# Altium PCB PCB2.PcbDoc
Units mm, origin at the board's own origin, x right, y up, seen from the top; angles counter-clockwise.
Board outline 91.65 x 61.98 mm, 2 copper layers (Top Layer, Bottom Layer); 22 components, 20 nets, 77 pads, 0 vias.
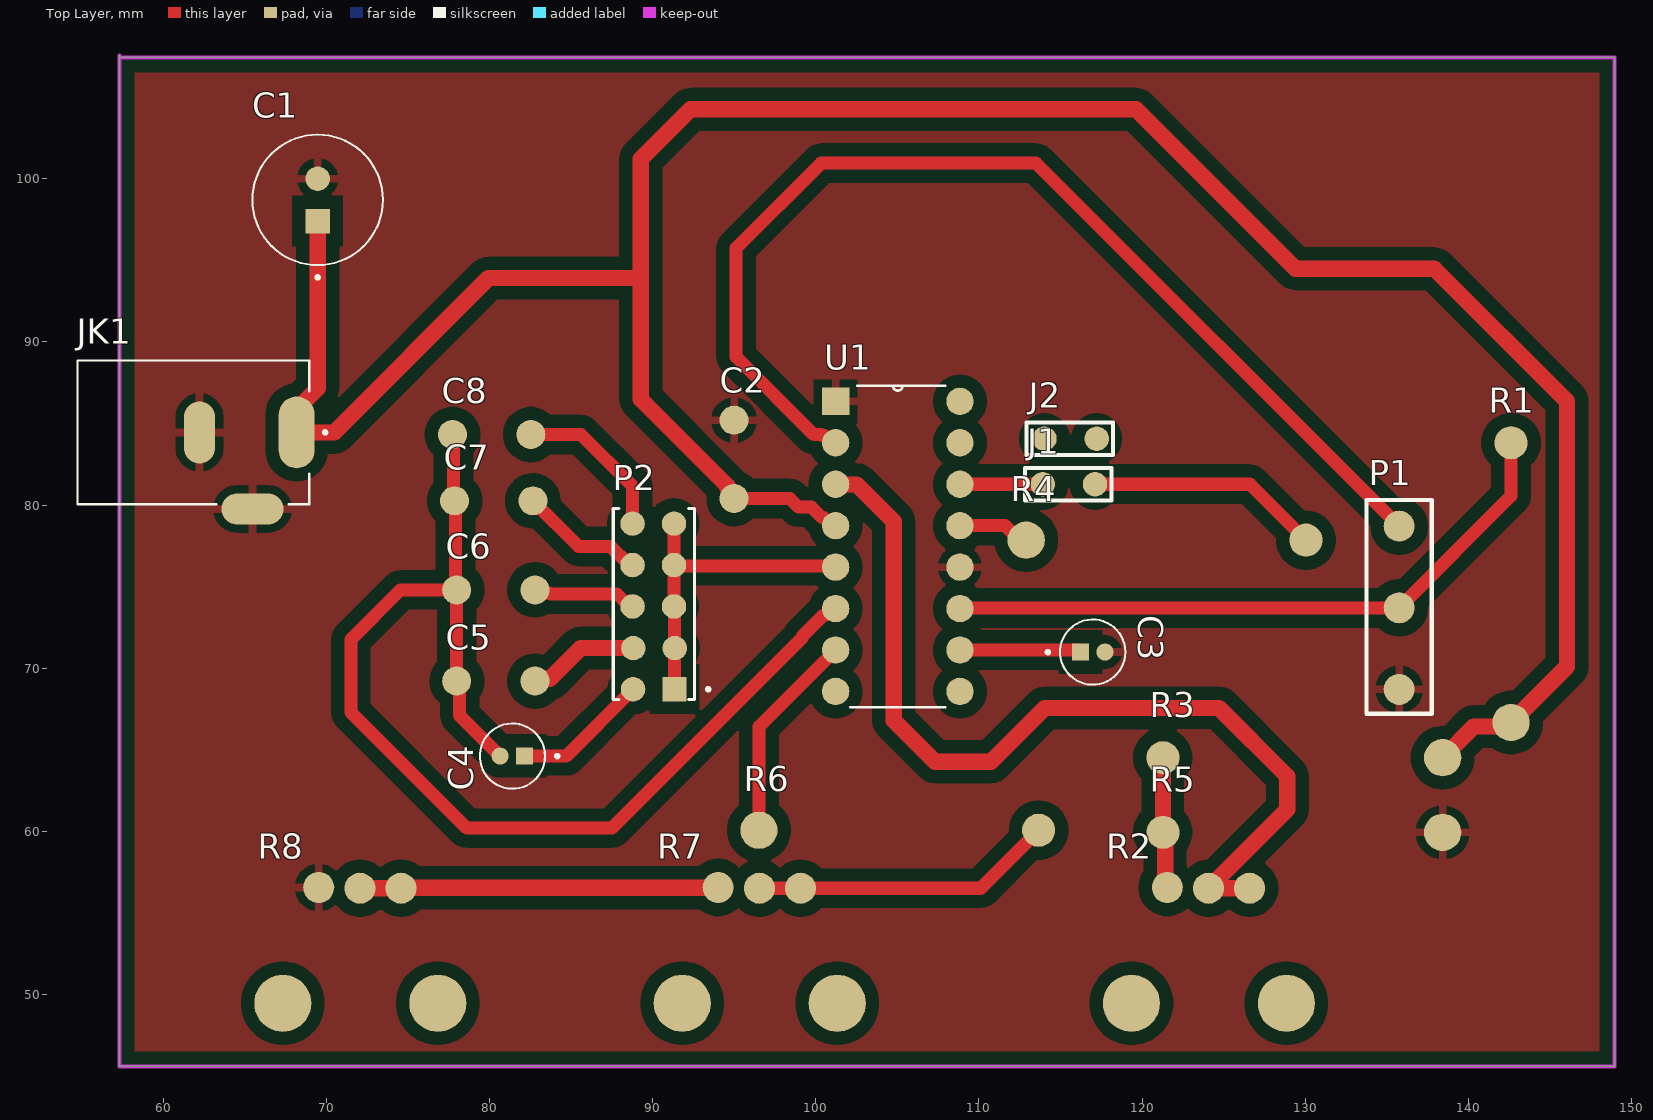
[diagram p0: Top Layer view]
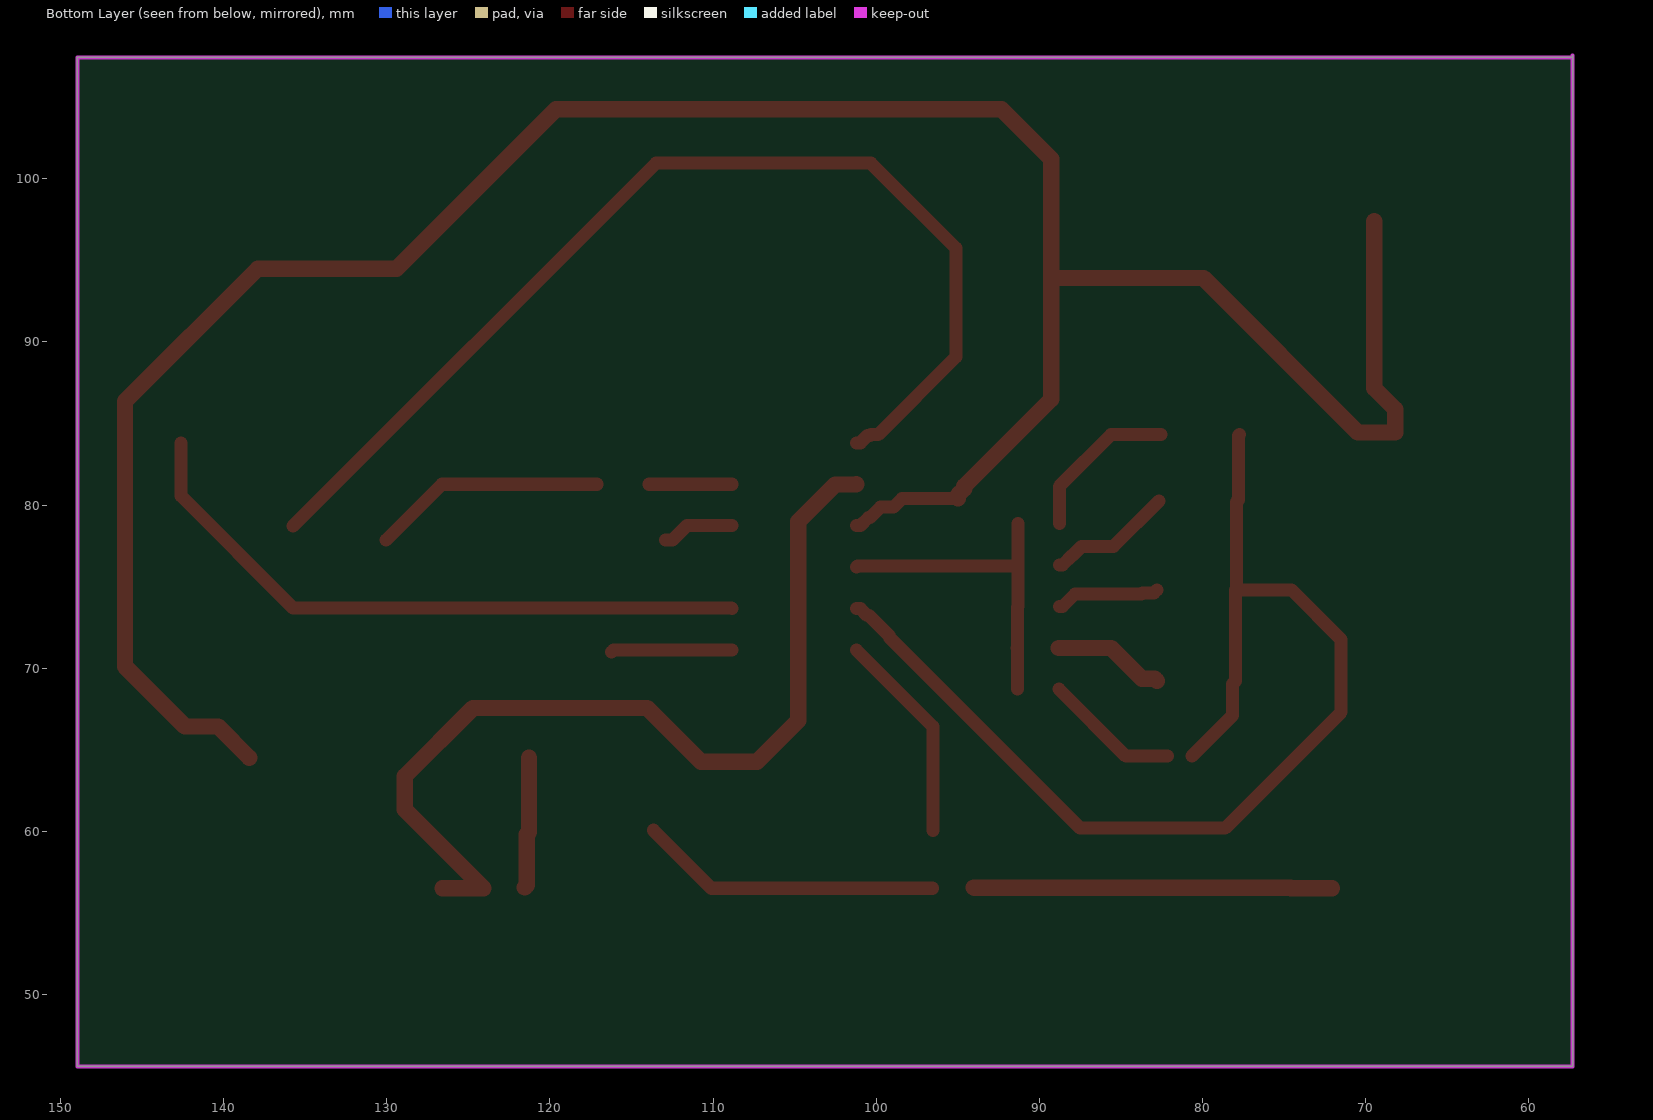
[diagram p1: Bottom Layer view, seen from below]

## Layer stack, top to bottom
Top Solder: solder mask 0.0102, Solder Resist, Dk 3.5
Top Layer: signal copper 0.0356
Dielectric 1: dielectric 0.32, FR-4, Dk 4.8
Bottom Layer: signal copper 0.0356
Bottom Solder: solder mask 0.0102, Solder Resist, Dk 3.5

## Board outline
57.319,45.593 57.319,107.569 57.319,107.442 148.971,107.442 148.971,45.593

## Design rules (kind name [scope] priority, off if disabled: settings)
Clearance [All] p1: gap=0.8 ignorepadtopadclearanceinfootprint=FALSE except(0: Arc-Hole Track-Hole SMDPad-Hole THPad-Hole Via-Hole Fill-Hole Poly-Hole Region-Hole Text-Hole)
DiffPairsRouting [All] p1: maxlimit=1 minlimit=0.254 mostfreqgap=0.254 toplayer_minwidth=0.381 toplayer_maxwidth=1 toplayer_prefwidth=0.381 bottomlayer_minwidth=0.381 bottomlayer_maxwidth=1 bottomlayer_prefwidth=0.381 maxuncoupledlength=12.7
PolygonConnect [All] p1: connectstyle=Relief reliefconductorwidth=0.5 reliefentries=4 polygonreliefangle="90 Angle" airgapwidth=0.5
RoutingVias [All] p1: holewidth=0.711 width=1.27 viastyle="Through Hole" minholewidth=0.711 minwidth=1.27 maxholewidth=0.711 maxwidth=1.27
SolderMaskExpansion [All] p1: expansion=0.8 istentingtop=FALSE
Width [All] p1: maxlimit=1 minlimit=0.254 preferedwidth=0.254 minimp=50.000000 maximp=50.000000 favimp=50.000000
29 further rules are at their usual default settings.

## Components (designator, comment, footprint, x,y, rotation, side; value= is the part's Value field where it differs from the comment)
C1 "100uF CAPATICANCE" EEUFR1V101B 69.469,98.709 r90 top
C2 "0.1uF capaticance" "TH CAPACITOR" 94.996,82.804 r180 top
C3 "10uF TH CAPACITANCE" "10uf capacitance" 116.979,71.093 r0 top
C4 "10uF TH CAPACITANCE" "10uf capacitance" 81.407,64.516 r180 top
C5 "105 capaticance" "TH CAPACITOR" 80.391,69.215 r90 top
C6 "473 capaticance" "TH CAPACITOR" 80.391,74.803 r90 top
C7 "222 capaticance" "TH CAPACITOR" 80.264,80.264 r90 top
C8 "101 capacitance" "TH CAPACITOR" 80.137,84.328 r90 top
J1 "JUMPER" JUMPER 117.119,81.28 r180 top
J2 "JUMPER" JUMPER 117.221,84.074 r180 top
JK1 "DC Barrek Jack_-" "DC BARREL JACK" 62.23,84.455 r270 top
P1 "1x3 header" "1x3 header - duplicate" 135.763,78.707 r180 top
P2 "2.54mm 2x5 TH Header" "2x5 HEADER" 90.073,69.987 r270 top
R1 "1K TH RESISTOR" "TH RESISTOR" 142.494,74.422 r0 top
R2 "50K POTANTIOMETER" POTANTIOMETER 122.25,40.462 r90 top
R3 "5.1K TH RESISTOR" "TH RESISTOR" 130.683,64.389 r90 top
R4 "330 OHM TH RESISTOR" "TH RESISTOR" 120.65,77.978 r270 top
R5 "5.1K TH RESISTOR" "TH RESISTOR" 130.683,59.817 r90 top
R6 "5.1K TH RESISTOR" "TH RESISTOR" 104.267,60.198 r270 top
R7 "50K POTANTIOMETER" POTANTIOMETER 94.721,40.462 r90 top
R8 "100K POTANTIOMETER" POTANTIOMETER 70.235,40.462 r90 top
U1 "XR2206" XR2206 104.902,77.47 r0 top

## Footprints (in the part's own frame and the unit in brackets; to place one, negate y for a bottom-side part, rotate by r counter-clockwise, add the part's x,y. Pads: shape width x height; smd on the part's side, far side on the other; paste and mask are expansions set on the pad)
"1x3 header - duplicate" [mm]
  round 1.905 smd mask+0.05: 1(0,0) 2(0,5) 3(0,10)
  silkscreen extent -2,-1.6 2,11.5
"2x5 HEADER" [mm]
  rect 1.5x1.5 smd: 1(1.27,1.27)
  round 1.5 smd: 2(-1.25,1.29) 3(-3.8,1.24) 4(-6.34,1.24) 5(1.27,-1.27) 6(-1.25,-1.25) 7(-3.8,-1.3) 8(-6.34,-1.3) 9(-8.88,1.24) 10(-8.88,-1.3)
  silkscreen extent -9.8,-2.49 1.91,3.44, body extent -10.15,-2.5 2.55,2.58, height 9.5
"10uf capacitance" [mm]
  rect 1.05x1.05 smd: 1(-0.75,-0.1)
  round 1.05 smd: 2(0.75,-0.1)
  silkscreen extent -2.85,-2.1 2,1.9, body extent -2,-2.1 2,1.9, height 7
"DC BARREL JACK" [mm]
  oval 4.4x2.2 smd: 1(0,5.955)
  oval 3.8x1.9 smd: 2(0,0)
  oval 1.9x3.8 smd: 3(4.69,3.25)
  silkscreen extent -4.4,-7.49 4.4,7.8, body extent -4.4,-7.77 5.15,6.65, height 11.34
EEUFR1V101B [mm] "100uF CAPATAICANCE"
  rect 1.5x1.5 smd: 1(-1.3,0)
  round 1.5 smd paste+0: 2(1.3,0)
  silkscreen extent -4.85,-4 4,4, body extent -4,-4 4,4, height 11.5
JUMPER [mm]
  round 1.5 smd mask+0.05: 1(0,0) 2(3.2,0)
  silkscreen extent -1,-1 4.3,1
POTANTIOMETER [mm]
  round 1.905 smd mask+0.05: 1(16.1,0.7) 2(16.053,-1.829) 3(16.053,-4.343)
  round 3.5 smd mask+0.05: ""(9,-6.6) ""(9,2.9)
  body extent 3.65,-6.68 16.2,3.07, height 19.78
"TH CAPACITOR" [mil]
  round 70 smd mask+1.97: 1(0,94.49) 2(0,-94.49)
  body extent -45,-110 45,110, height 250
"TH RESISTOR" [mil]
  round 90 smd mask+1.97: 1(5,-305)
  round 80 smd mask+1.97: 2(5,370)
  body extent -59,-311 73,390, height 142
XR2206 [mil]
  rect 66x66 smd: 1(-145,350)
  round 66 smd: 2(-145,250) 3(-145,150) 4(-145,50) 5(-145,-50) 6(-145,-150) 7(-145,-250) 8(-145,-350) 9(155,-350) 10(155,-250) 11(155,-150) 12(155,-50) 13(155,50) 14(155,150) 15(155,250) 16(155,350)
  silkscreen extent -110,-388 120,388, body extent -150,-396 160,396, height 210

## Part data
JK1: "Power Barrel Connector Jack 2.10mm ID _0.083_, 5.50mm OD _0.217_ Through Hole, Right Angle", Package="Non-Standard MPD", Availability=Unavailable, MF=MPD, MP=EJ508A, Price=None, SnapEDA_Link=https://www.snapeda.com/parts/EJ508A/MPD%20%28Memory%20Protection%20Devices%29/view-part/474399/?ref=snap
P2: "2.54mm 2X3 TH Header"
R8: library part "100K POTANTIMETER"

## Nets (pads, with @x,y where several pads share a name; then routed paths per layer and width w, separated by ;. In a path a pad name is that pad's centre, name@x,y a point inside that pad or via, vN(x,y) a via of type N, cw(c..) or ccw(c..) an arc to the next point about the centre after c; other vN are vias at no path point)
GND: C1.2 C2.2 C3.2 JK1.2 JK1.3 P1.3 R5.1 R8.1 U1.1 U1.12
NetC3_1: C3.1 U1.10 | length 7.4
  Top Layer w0.8: U1.10 116.102,71.12 C3.1
NetC4_1: C4.1 P2.5 | length 8.3
  Top Layer w0.8: C4.1 84.702,64.616 P2.5
NetC4_2: C4.2 C5.1 C6.1 C7.1 C8.1 U1.6 | length 71.4
  Top Layer w0.8: C8.1 77.8,84.264 77.8,80.328 C7.1 77.927,80.2 77.927,74.867 C6.1 ; C4.2 78.178,67.095 78.178,69.028 C5.1 C6.1 ; U1.6 100.982,73.66 100.544,73.222 100.438,73.222 99.181,71.964 99.181,71.876 87.503,60.198 78.613,60.198 71.501,67.31 71.501,71.755 74.549,74.803 C6.1
NetC5_2: C5.2 P2.6 | length 6.9
  Top Layer w1: C5.2 82.94,69.364 83.715,69.364 85.588,71.237 P2.6
NetC6_2: C6.2 P2.7 | length 6.4
  Top Layer w0.8: C6.2 82.978,74.616 83.67,74.616 83.737,74.549 87.822,74.549 88.584,73.787 P2.7
NetC7_2: C7.2 P2.8 | length 7.7
  Top Layer w0.8: C7.2 85.458,77.47 87.412,77.47 87.965,76.917 87.994,76.917 88.584,76.327 P2.8
NetC8_2: C8.2 P2.10 | length 9.8
  Top Layer w0.8: C8.2 85.598,84.328 88.773,81.153 P2.10
NetJ1_1: J1.1 R4.2 | length 14.3
  Top Layer w0.8: J1.1 126.619,81.28 R4.2
NetJ1_2: J1.2 U1.14 | length 5.1
  Top Layer w0.8: U1.14 J1.2
NetP1_1: P1.1 U1.2 | length 67
  Top Layer w0.8: U1.2 100.982,83.82 100.544,84.258 100.376,84.258 100.312,84.322 99.884,84.322 95.123,89.083 95.123,95.758 100.33,100.965 113.505,100.965 P1.1
NetP1_2: P1.2 R1.2 U1.11 | length 39.9
  Top Layer w0.8: U1.11 108.863,73.684 135.739,73.684 P1.2 142.621,80.565 R1.2
NetP2_1: P2.1 P2.2 P2.3 P2.4 P2.9 U1.5 | length 20.1
  Top Layer w0.8: P2.9 P2.4 ; P2.1 91.353,68.727 91.353,71.227 P2.2 91.338,71.262 91.338,73.762 P2.3 P2.4 ; U1.5 101.155,76.263 91.376,76.263 P2.4
NetR2_1: R2.1 R3.2 R5.2 | length 8.1
  Top Layer w1: R3.2 R5.2 121.418,59.811 121.418,56.695 R2.1
NetR2_2: R2.2 R2.3 U1.3 | length 56.4
  Top Layer w1: U1.3 101.237,81.262 102.507,81.262 104.775,78.994 104.775,66.802 107.315,64.262 110.744,64.262 114.046,67.564 124.714,67.564 128.905,63.373 128.905,61.341 R2.2 R2.3
NetR4_1: R4.1 U1.13 | length 4.4
  Top Layer w0.8: U1.13 111.612,78.74 112.501,77.851 R4.1
NetR6_1: R6.1 U1.7 | length 13
  Top Layer w0.8: R6.1 96.52,66.421 U1.7
NetR6_2: R6.2 R7.2 R7.3 | length 18.6
  Top Layer w0.8: R7.2 R7.3 110.109,56.515 R6.2
NetR7_1: R7.1 R8.2 R8.3 | length 22
  Top Layer w1: R8.2 R8.3 74.602,56.539 93.997,56.539 R7.1
VCC: C1.1 C2.1 JK1.1 R1.1 R3.1 U1.4 | length 160
  Top Layer w0.8: C2.1 98.412,80.404 98.933,79.883 99.734,79.883 100.375,79.242 100.48,79.242 100.982,78.74 U1.4
  Top Layer w1: C1.1 69.469,87.164 68.185,85.88 JK1.1 70.485,84.455 79.947,93.916 89.181,93.916 ; 89.281,101.219 89.281,93.916 89.281,86.487 94.607,81.161 94.607,81.004 94.996,80.615 C2.1 ; 89.352,101.29 92.329,104.267 119.634,104.267 129.413,94.488 137.922,94.488 146.05,86.36 146.05,70.104 R1.1 142.375,66.429 140.343,66.429 R3.1
pads on no net: J2.1 J2.2 R2. R7. R8. U1.8 U1.9 U1.15 U1.16

## Polygon pours and split planes (outlines as drawn)
GND on Top Layer "GND_L01_P000" (solid, pour order 0): 57.404,107.442 57.531,107.569 148.844,107.569 148.844,45.593 148.717,45.466 57.15,45.466 57.15,107.442 57.277,107.569

## Keep-outs
Keep-Out Layer:
  lines w0.254: 57.319,107.442 148.971,107.442 148.971,45.593 57.319,45.593 57.319,107.569